# Altium PCB 65W LED Board.PcbDoc (part 1 of 3)
Units mm, origin at the board's own origin, x right, y up, seen from the top; angles counter-clockwise.
Board outline 40 x 69 mm, 4 copper layers (Top Layer, Layer 1, Layer 2, Bottom Layer), stack 1.573 mm thick; 54 components, 26 nets, 122 pads, 144 vias.
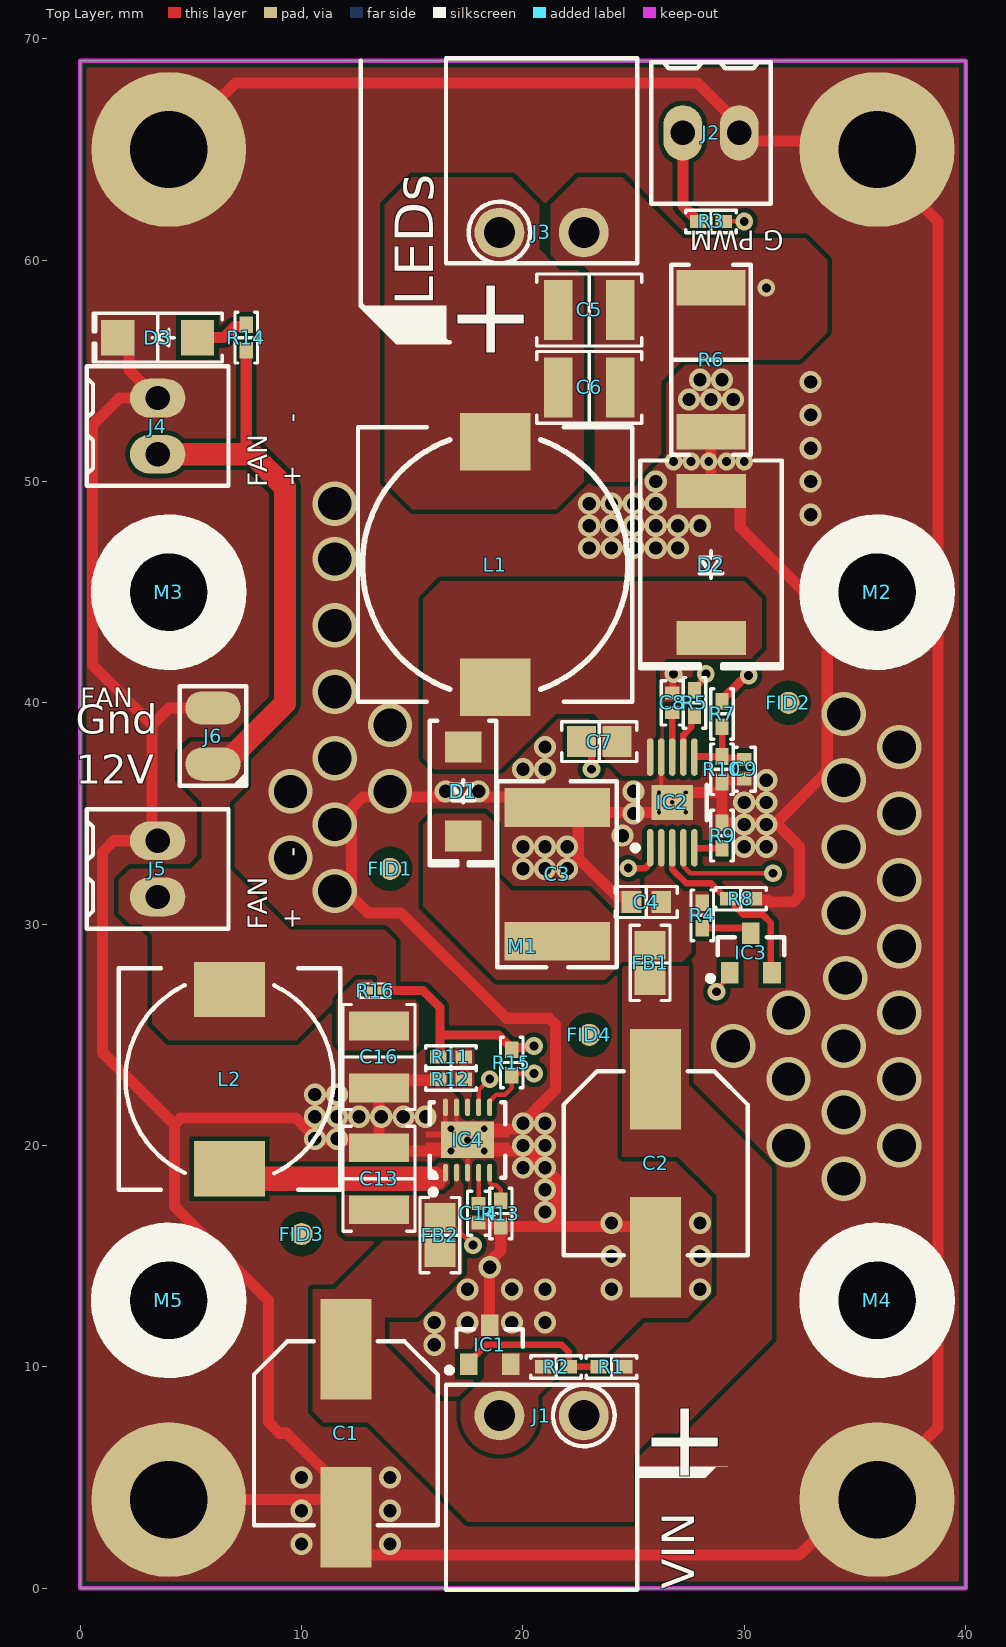
[diagram p0: Top Layer view]
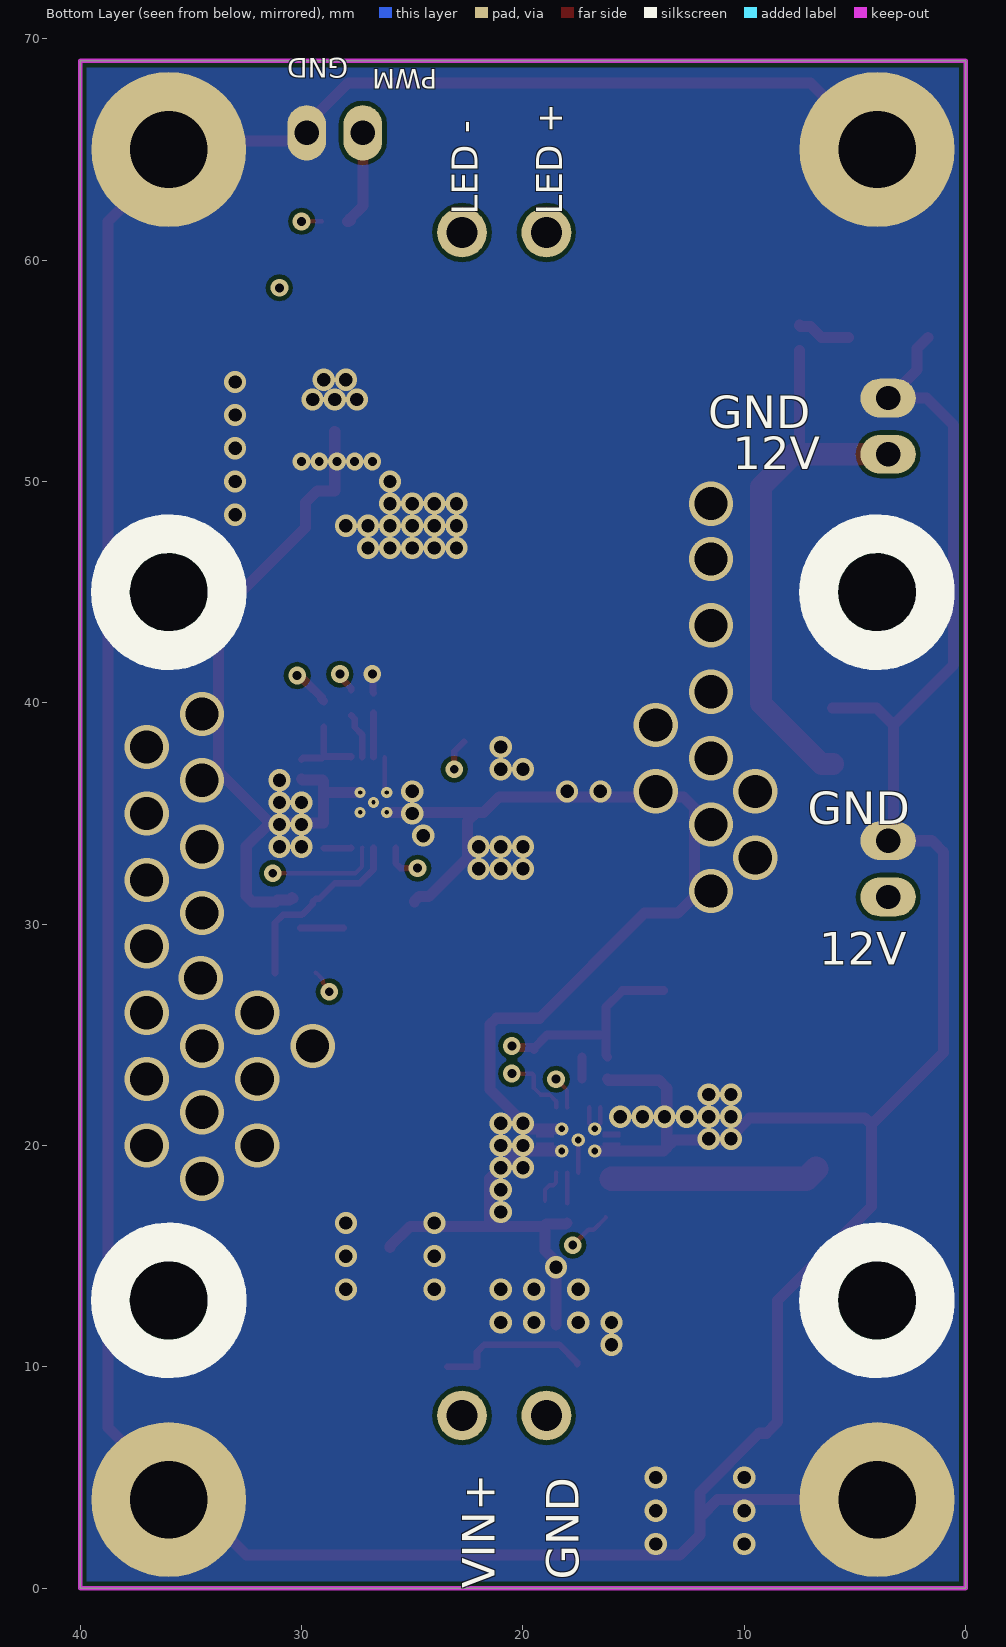
[diagram p1: Bottom Layer view, seen from below]
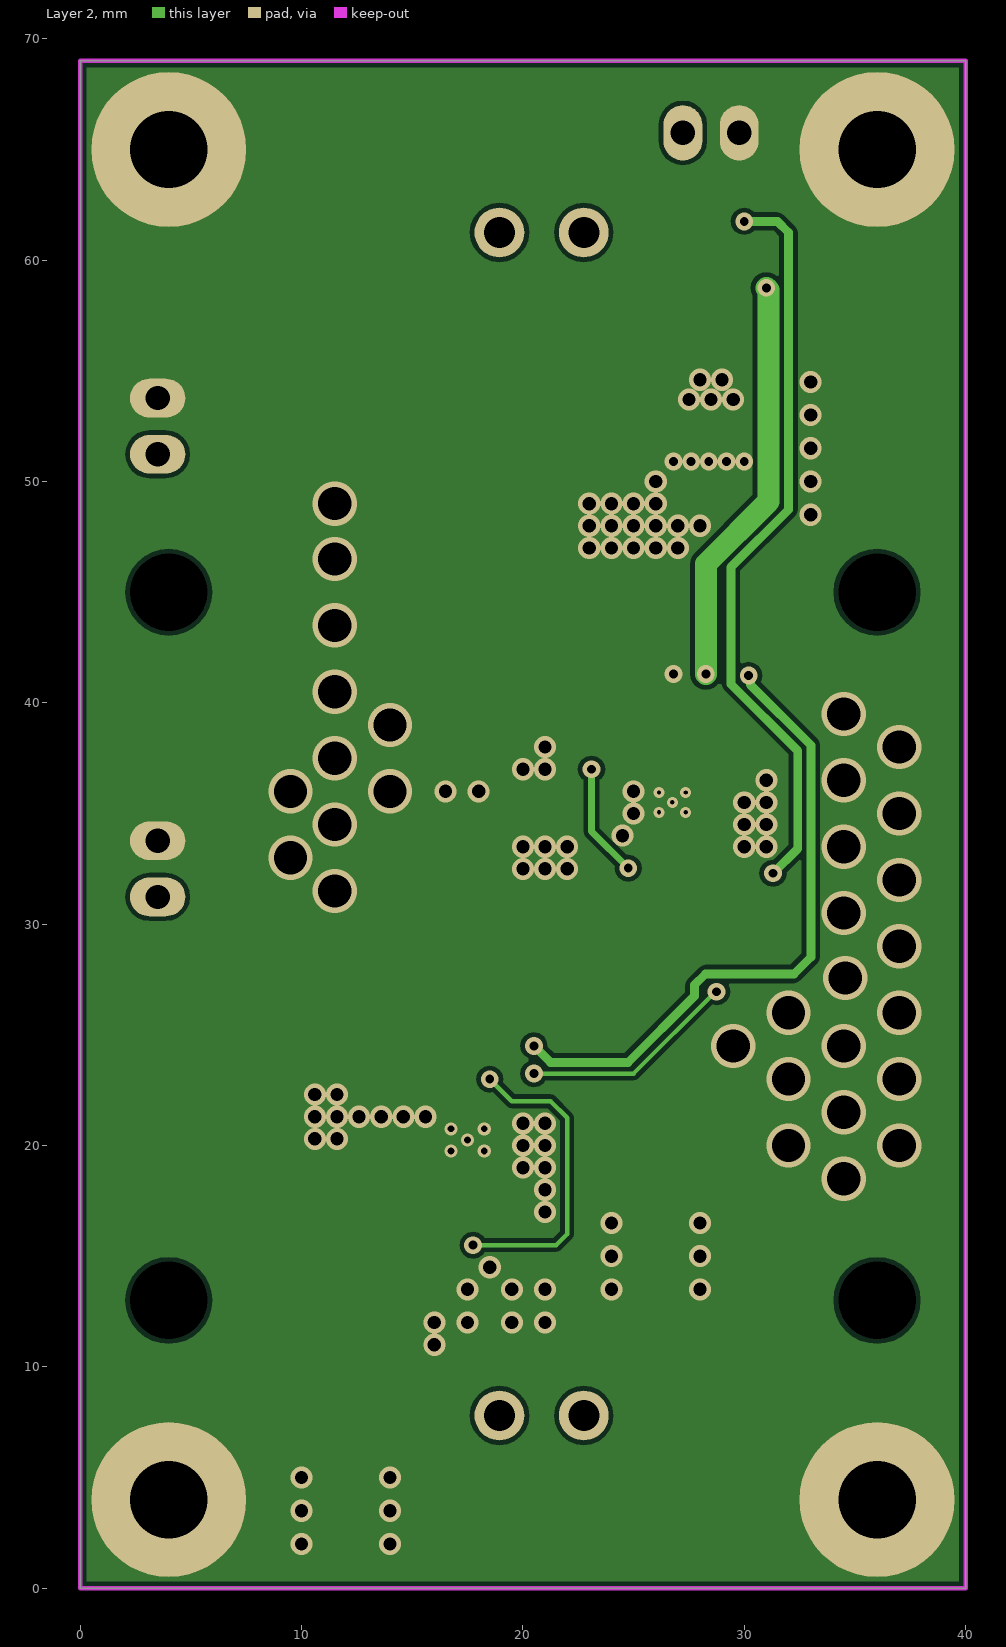
[diagram p2: Layer 2]

## Layer stack, top to bottom
Top Solder: solder mask 0.01, Solder Resist, Dk 3.8
Top Layer: signal copper 0.036
Dielectric 1: prepreg 0.2, PP-006, Dk 4.6
Layer 1: signal copper 0.018
Dielectric1: core 1.065, FR-4, Dk 4.8
Layer 2: signal copper 0.018
Dielectric 2: prepreg 0.2, PP-006, Dk 4.6
Bottom Layer: signal copper 0.036
Bottom Solder: solder mask 0.01, Solder Resist, Dk 3.8

## Board outline
0,0 40,0 40,69 0,69

## Design rules (kind name [scope] priority, off if disabled: settings)
Clearance PadClearance [IsPad vs IsPad] p1: gap=0.2 ignorepadtopadclearanceinfootprint=FALSE except(0: Arc-Hole Track-Hole SMDPad-Hole THPad-Hole Via-Hole Fill-Hole Poly-Hole Region-Hole Text-Hole)
Clearance [All] p2: gap=0.2 ignorepadtopadclearanceinfootprint=FALSE except(0: Arc-Hole Track-Hole SMDPad-Hole THPad-Hole Via-Hole Fill-Hole Poly-Hole Region-Hole Text-Hole)
ComponentClearance "ComponentClearance Mech" [HasFootprint('40MM Fan') vs HasFootprint('M3x12.7 M-F Standoff')] p1: gap=0.254 collisioncheckmode=3 verticalgap=0 showdistances=FALSE
ComponentClearance [All] p2: gap=0.254 collisioncheckmode=3 verticalgap=0.254 showdistances=FALSE
Height [All] p1: minheight=0 maxheight=50 prefheight=12.7
HoleSize [All] p1: absolutevalues=TRUE maxlimit=6 minlimit=0.4 maxpercent=80.000 minpercent=20.000
HoleToHoleClearance [All] p1: gap=0.2 allowstackedmicrovias=TRUE
MinimumSolderMaskSliver [All] p1: minsoldermaskwidth=0
PolygonConnect ViaConnect [IsVia] p1: connectstyle=Direct reliefconductorwidth=0.254 reliefentries=4 polygonreliefangle="90 Angle" airgapwidth=0.254
PolygonConnect [All] p2: connectstyle=Direct reliefconductorwidth=0.3 reliefentries=4 polygonreliefangle="90 Angle" airgapwidth=0.254
RoutingVias [All] p1: holewidth=0.6 width=1 viastyle="Through Hole" minholewidth=0.4 minwidth=0.8 maxholewidth=5 maxwidth=6
SilkToSilkClearance [All] p1: silktosilkclearance=0
SilkToSolderMaskClearance SilkscreenOverComponentPads [IsPad] p1: minsilkscreentomaskgap=0.05 clearancetoexposedcopper=TRUE
SolderMaskExpansion "Large Hole Opening" [IsVia AND (HoleDiameter > 0.6)] p1: expansion=0.18 istentingtop=FALSE
SolderMaskExpansion "Via Tenting" [IsVia AND (HoleDiameter < 0.6)] p2: expansion=-2 istentingtop=TRUE
SolderMaskExpansion [All] p3: expansion=0.1 istentingtop=FALSE
Width [All] p1: maxlimit=2 minlimit=0.2 preferedwidth=0.4
23 further rules are at their usual default settings.

## Classes and differential pairs
component class Top: C1 C2 FID1 FID2 FID3 FID4 IC1 J1 M1 M2 M3 M4 M5 R1 R2
component class "LED Driver": C3 C4 C5 C6 C7 C8 C9 D1 D2 FB1 IC2 IC3 J2 J3 L1 R3 R4 R5 R6 R7 R8 R9 R10
component class "12V Supply": C13 C14 C16 D3 FB2 IC4 J4 J5 J6 L2 R11 R12 R13 R14 R15 R16

## Components (designator, comment, footprint, x,y, rotation, side; value= is the part's Value field where it differs from the comment)
C1 "47uF" "CAP ALUM 8.3MM" 12,7 r270 top
C2 "47uF" "CAP ALUM 8.3MM" 26,19.2 r270 top
C3 "22uF" "TDK CKG57N" 21.55,32.25 r270 top
C4 "10nF" "CAP 0603/1608" 25.575,31 r0 top
C5 "10uF" "CAP 1210/3225 - 2.8MM" 23,57.75 r180 top
C6 "10uF" "CAP 1210/3225 - 2.8MM" 23,54.25 r180 top
C7 "100nF" "CAP 0805/2012" 23.45,38.25 r180 top
C8 "100nF" "CAP 0402/1005" 26.75,40 r90 top
C9 "10nF" "CAP 0402/1005" 30,37 r90 top
C13 "2.2uF" "CAP 1210/3225 - 2.5MM" 13.5,18.5 r270 top
C14 "56nF" "CAP 0402/1005" 18,16.94 r90 top
C16 "22uF" "CAP 1210/3225 - 2.8MM" 13.5,24 r90 top
D1 "SK220ATR" "ST DO214AC SMA" 17.3,36 r270 top
D2 "MBRS3100T3G" "ST DO214AB SMC" 28.5,46.25 r270 top
D3 "LTST-C230KGKT" "LED 1206/3216 GREEN" 3.5,56.5 r180 top
FB1 "MPZ2012S331ATD25" "FER 0805/2012" 25.75,28.25 r270 top
FB2 "MI0805J102R-10" "FER 0805/2012" 16.25,15.95 r270 top
FID1 "Fiducial" Fiducial 14,32.5 r90 top
FID2 "Fiducial" Fiducial 32,40 r90 top
FID3 "Fiducial" Fiducial 10,16 r90 top
FID4 "Fiducial" Fiducial 23,25 r90 top
IC1 "=ManufacturerPartNumber1" "INFINEON SOT-23-3" 18.5,11 r90 top
IC2 "TI TPS92512HVDGQR" "TI MSOP-10 DGQ" 26.75,35.5 r90 top
IC3 "='Manufacturer''Part''Number'1" "INFINEON SOT-23-3" 30.3,28.7 r90 top
IC4 "TI LM5166" "TI PVSON-10 3x3MM DRC" 17.5,20.25 r90 top
J1 "2 Pin" "FCI 06-381-2PIN" 20.845,4.5 r180 top
J2 "2 Pin" "TE 282834-2" 28.5,65.75 r0 top
J3 "2 Pin" "FCI 06-381-2PIN" 20.845,64.552 r0 top
J4 "2 Pin" "TE 282834-2" 3.5,52.5 r90 top
J5 "2 Pin" "TE 282834-2" 3.5,32.5 r90 top
J6 "2 Pin" "2 Pin Solder Pads" 6,38.5 r90 top
L1 "33uH" "TDK SLF12575" 18.75,46.25 r90 top
L2 "100uH" "TDK SLF10145" 6.75,23 r90 top
M1 "Fan" "40MM Fan" 20,29 r0 top locked
M2 "Standoff" "M3x12.7 M-F Standoff" 36,45 r0 top locked
M3 "Standoff" "M3x12.7 M-F Standoff" 4,45 r0 top locked
M4 "Standoff" "M3x12.7 M-F Standoff" 36,13 r0 top locked
M5 "Standoff" "M3x12.7 M-F Standoff" 4,13 r0 top locked
R1 "33kR" "RES 0402/1005" 24,10 r0 top
R2 "10kR" "RES 0402/1005" 21.5,10 r180 top
R3 "680R" "RES 0402/1005" 28.5,61.75 r180 top
R4 "51kR" "RES 0402/1005" 28.1,30.4 r90 top
R5 "1kR" "RES 0402/1005" 27.75,40 r90 top
R6 "150mR" "STACKPOLE CSRN2512" 28.5,55.5 r90 top
R7 "63.4kR" "RES 0402/1005" 29,39.5 r270 top
R8 "1.54kR" "RES 0402/1005" 29.85,31.15 r180 top
R9 "348kR" "RES 0402/1005" 29,34 r270 top
R10 "9.76kR" "RES 0402/1005" 29,37 r90 top
R11 "1.1MR" "RES 0402/1005" 16.75,24 r180 top
R12 "124kR" "RES 0402/1005" 16.75,23 r0 top
R13 "147kR" "RES 0402/1005" 19,16.925 r90 top
R14 "680R" "RES 0402/1005" 7.5,56.5 r90 top
R15 "10kR" "RES 0402/1005" 19.5,23.75 r90 top (schematic designator R?)
R16 "1.1R" "RES 0201/0603" 13.325,27 r0 top

## Footprints (in the part's own frame and the unit in brackets; to place one, negate y for a bottom-side part, rotate by r counter-clockwise, add the part's x,y. Pads: shape width x height; smd on the part's side, far side on the other; paste and mask are expansions set on the pad)
"2 Pin Solder Pads" [mm]
  oval 1.5x2.5 smd: 1(-1.27,0) 2(1.27,0)
  silkscreen extent -2.25,-1.5 2.25,1.5
"40MM Fan" [mm]
  silkscreen extent -17.85,-17.85 17.85,17.85, body extent -20,-20 20,20, height 27.79
"CAP 0402/1005" [mm] "Chip Capacitor, 2-Leads, Body 1.02x0.51mm, IPC Medium Density"
  rect 0.6x0.64 smd: 1(-0.44,0) 2(0.44,0)
  silkscreen extent -1,-0.5 1,0.5, body extent -0.5,-0.26 0.5,0.26, height 0.52
"CAP 0603/1608" [mm] "Chip Capacitor, 2-Leads, Body 1.60x0.80mm, IPC Medium Density"
  rect 0.9x1 smd: 1(-0.675,0) 2(0.675,0)
  silkscreen extent -1.4,-0.7 1.4,0.7, body extent -0.8,-0.41 0.8,0.41, height 0.82
"CAP 0805/2012" [mm] "Chip Capacitor, 2-Leads, Body 2.00x1.20mm, IPC Medium Density"
  rect 1.3x1.4 smd: 1(-0.8,0) 2(0.8,0)
  silkscreen extent -1.7,-0.9 1.7,0.9, body extent -1,-0.64 1,0.64, height 1.26
"CAP 1210/3225 - 2.5MM" [mm] "Chip Capacitor, 2-Leads, Body 3.20x2.50mm, IPC Medium Density"
  rect 1.3x2.7 smd: 1(-1.4,0) 2(1.4,0)
  silkscreen extent -2.37,-1.63 2.37,1.63, body extent -1.6,-1.25 1.6,1.25, height 2.5
"CAP 1210/3225 - 2.8MM" [mm] "Chip Capacitor, 2-Leads, Body 3.20x2.50mm, IPC Medium Density"
  rect 1.3x2.7 smd: 1(-1.4,0) 2(1.4,0)
  silkscreen extent -2.37,-1.63 2.37,1.63, body extent -1.6,-1.25 1.6,1.25, height 2.8
"CAP ALUM 8.3MM" [mm] "Aluminum Electrolytic Capacitor, Body 8.30x8.30x10.50mm, IPC Low Density"
  rect 4.55x2.3 smd: 1(-3.8,0) 2(3.8,0)
  silkscreen extent -4.15,-4.15 4.15,4.15, body extent -4.95,-4.15 4.95,4.15, height 10.5
"FCI 06-381-2PIN" [mm] "FCI Pluggable Terminal Block"
  round 2.25 hole 1.4: 1(-1.905,-3.302) 2(1.905,-3.302)
  silkscreen extent -4.32,-4.7 4.32,4.57, body extent -4.4,-4.7 4.4,4.5, height 7.6
"FER 0805/2012" [mm] "Chip Ferrite, 2-Leads, Body 2.00x1.20mm, IPC Medium Density"
  rect 1.3x1.4 smd: 1(-0.8,0) 2(0.8,0)
  silkscreen extent -1.7,-0.9 1.7,0.9, body extent -1,-0.64 1,0.64, height 1.26
Fiducial [mm]
  round 1 smd paste-1 mask+0.5: F(0,0)
"INFINEON SOT-23-3" [mm] "SOT23, 3-Leads, Body 2.90x2.40mm, Pitch 0.95mm, IPC Medium Density"
  rect 0.972x0.802 smd: 1(-0.885,0.95) 2(-0.885,-0.95) 3(0.885,0)
  silkscreen extent -1.27,-1.5 0.7,1.95, body extent -1.16,-1.45 1.16,1.45, height 1
"LED 1206/3216 GREEN" [mm] "Chip Diode, 2-Leads, Body 3.13x1.55mm, IPC Medium Density"
  rect 1.5x1.6 smd: 1(-1.8,0) 2(1.8,0)
  silkscreen extent -2.92,-1.1 2.92,1.1, body extent -1.6,-0.8 1.6,0.8, height 0.9
"M3x12.7 M-F Standoff" [mm]
  round 1 hole 3.5 unplated: M(0,0)
  silkscreen extent -2.64,-2.64 2.64,2.64, body extent -2.79,-3.23 2.79,3.23, height 12.71
"RES 0201/0603" [mm] "Chip Resistor, 2-Leads, Body 0.60x0.30mm, IPC Medium Density"
  rect 0.44x0.35 smd: 1(-0.325,0) 2(0.325,0)
  silkscreen extent -0.7,-0.33 0.7,0.33, body extent -0.3,-0.15 0.3,0.15, height 0.21
"RES 0402/1005" [mm] "Chip Resistor, 2-Leads, Body 1.0x0.5mm, IPC Medium Density"
  rect 0.75x0.6 smd: 1(-0.575,0) 2(0.575,0)
  silkscreen extent -1.14,-0.51 1.14,0.51, body extent -0.5,-0.25 0.5,0.25, height 0.35
"ST DO214AB SMC" [mm] "Molded Diode, 2-Leads, Body 6.85x5.90mm, IPC Medium Density"
  rect 1.54x3.14 smd: 1(-3.325,0) 2(3.325,0)
  silkscreen extent -4.7,-3.2 4.7,3.2, body extent -3.97,-2.95 3.97,2.95, height 2.6
"ST DO214AC SMA" [mm] "Molded Diode, 2-Leads, Body 4.30x2.60mm, IPC Medium Density"
  rect 1.4x1.64 smd: 1(-2.015,0) 2(2.015,0)
  silkscreen extent -3.18,-1.5 3.35,1.5, body extent -2.6,-1.37 2.6,1.37, height 2.4
"STACKPOLE CSRN2512" [mm] "Chip Resistor, 2-Leads, Body 6.40x3.20mm, IPC Medium Density"
  rect 1.6x3.1 smd: 1(-3.25,0) 2(3.25,0)
  silkscreen extent -4.3,-1.8 4.3,1.8, body extent -3.25,-1.58 3.25,1.57, height 0.6
"TDK CKG57N" [mm] "Chip Capacitor, 2-Leads, Body 6.00x5.00mm, IPC Medium Density"
  rect 1.75x4.75 smd: 1(-3.025,0) 2(3.025,0)
  silkscreen extent -4.2,-2.7 4.2,2.7, body extent -3,-2.5 3,2.5, height 3.5
"TDK SLF10145" [mm] "Precision Wire Wound Inductor, 2-Leads, Body 10.10x10.10mm, IPC Medium Density"
  rect 2.5x3.2 smd: 1(-4.05,0) 2(4.05,0)
  silkscreen extent -5,-5 5,5, body extent -5.05,-5.05 5.05,5.05, height 4.53
"TDK SLF12575" [mm] "Precision Wire Wound Inductor, 2-Leads, Body 12.50x12.50mm, IPC Medium Density"
  rect 2.6x3.2 smd: 1(-5.55,0) 2(5.55,0)
  silkscreen extent -6.2,-6.2 6.2,6.2, body extent -6.33,-6.32 6.34,6.33, height 7.85
"TE 282834-2" [mm]
  oval 1.75x2.5 hole 1.1: 1(-1.27,0) 2(1.27,0)
  silkscreen extent -2.7,-3.2 2.7,3.2, body extent -2.77,-3.25 2.77,3.25, height 10
"TI MSOP-10 DGQ" [mm] "TSSOP, 10-Leads, Body 3x3mm, Pitch 0.5mm, Thermal Pad 1.88x1.57mm, IPC Medium Density"
  oval 1.7x0.3 smd: 1(-2.05,1) 2(-2.05,0.5) 3(-2.05,0) 4(-2.05,-0.5) 5(-2.05,-1) 6(2.05,-1) 7(2.05,-0.5) 8(2.05,0) 9(2.05,0.5) 10(2.05,1)
  rect 1.57x1.88 smd: 11(0,0)
  silkscreen extent -2.17,-1.55 0.8,1.8, body extent -2.46,-1.5 2.46,1.5, height 1.2
"TI PVSON-10 3x3MM DRC" [mm] "PVSON, 10-Leads, Body 3.00x3.00mm, Pitch 0.50mm, Thermal Pad 1.65x2.40mm, IPC Medium Density"
  oval 0.8x0.23 smd: 1(-1.475,1) 2(-1.475,0.5) 3(-1.475,0) 4(-1.475,-0.5) 5(-1.475,-1) 6(1.475,-1) 7(1.475,-0.5) 8(1.475,0) 9(1.475,0.5) 10(1.475,1)
  rect 1.65x2.4 smd paste-5: 11(0,0)
  Top Layer region: 0.11,-1.9 0.39,-1.9 0.39,-1.1 0.11,-1.1
  Top Layer region: -0.11,-1.1 -0.39,-1.1 -0.39,-1.9 -0.11,-1.9
  Top Layer region: -0.11,1.9 -0.39,1.9 -0.39,1.1 -0.11,1.1
  Top Layer region: 0.11,1.1 0.39,1.1 0.39,1.9 0.11,1.9
  silkscreen extent -2.47,-1.7 1.7,1.7, body extent -1.55,-1.55 1.55,1.55, height 1

## Part data
C1 C2: library part "Polarised Capacitor", "Aluminum Electrolytic Capacitors - SMD 63volts 47uF 20% 85C 8X10", Case/Package=Radial, Dielectric Material=Aluminium, Manufacturer 1=Nichicon, Manufacturer Part Number 1=UUR1J470MNL1GS, Max Operating Temperature=85°C, Min Operating Temperature=-40°C, Package Quantity=500, Ripple Current=140mA, Supplier Part Number 1=493-6235-1-ND, Tolerance=20%, Voltage Rating=63V, Capacitance=47uF, Category="Aluminum Electrolytic Capacitors", ComponentLink1Description=https://datasheet.ciiva.com/6326/e-ur-6326870.pdf?src-supplier=Digi-Key, ComponentLink1URL=https://datasheet.ciiva.com/6326/e-ur-6326870.pdf?src-supplier=Digi-Key, ComponentLink2Description=https://datasheet.ciiva.com/6326/e-ur-6326872.pdf?src-supplier=Digi-Key, ComponentLink2URL=https://datasheet.ciiva.com/6326/e-ur-6326872.pdf?src-supplier=Digi-Key, ComponentLink3Description=https://datasheet.ciiva.com/11686/e-ur-11686922.pdf?src-supplier=Avnet, ComponentLink3URL=https://datasheet.ciiva.com/11686/e-ur-11686922.pdf?src-supplier=Avnet, ComponentLink4Description=https://datasheet.ciiva.com/16380/e-ur-16380363.pdf?src-supplier=Future+Electronics, ComponentLink4URL=https://datasheet.ciiva.com/16380/e-ur-16380363.pdf?src-supplier=Future+Electronics, Contact Plating=Tin, Diameter=8mm, Dissipation Factor=0.12%, Features="General Purpose", Height=10mm, Height - Seated (Max)=0.413inch, Lead Free="Lead Free", Length=10mm, Life (Hours)=2000Hour, Mount="Surface Mount", Packaging="Tape and Reel", Pricing 1="1=0.55000, 10=0.38800, 100=0.25520 (USD)", Radiation Hardening=No, RoHS=Yes, Stock 1=3231, Supplier 1=Digi-Key, Termination=SMD/SMT, Voltage Rating (DC)=63V
C3: library part Capacitor, "TDK - CKG57NX7S2A226M500JH - CAP, 22µF, 100V, 20%, X7S, 2220", Case Code (Imperial)=2220, Case Code (Metric)=5750, Dielectric=X7S, Manufacturer 1=TDK, Manufacturer Part Number 1=CKG57NX7S2A226M500JH, Max Operating Temperature=125°C, Min Operating Temperature=-55°C, Package Quantity=1, Supplier Part Number 1=445-5217-1-ND, Tolerance=20%, Voltage=100V, Capacitance=22uF, Case/Package=2220, Category="Ceramic Capacitors", ComponentLink1Description=https://datasheet.ciiva.com/30054/506print-detail-pdf-phplangenpart-nockg57nx7s2a226m500jhimp-unit-xmh-30054990.pdf?src-supplier=Onlinecomponents.com, ComponentLink1URL=https://datasheet.ciiva.com/30054/506print-detail-pdf-phplangenpart-nockg57nx7s2a226m500jhimp-unit-xmh-30054990.pdf?src-supplier=Onlinecomponents.com, ComponentLink2Description=https://datasheet.ciiva.com/24216/ckg57nx7s2a226m500jh-266237-24216591.pdf?src-supplier=Mouser, ComponentLink2URL=https://datasheet.ciiva.com/24216/ckg57nx7s2a226m500jh-266237-24216591.pdf?src-supplier=Mouser, ComponentLink3Description=https://datasheet.ciiva.com/8079/1796627-8079399.pdf?src-supplier=Element14, ComponentLink3URL=https://datasheet.ciiva.com/8079/1796627-8079399.pdf?src-supplier=Element14, ComponentLink4Description=https://datasheet.ciiva.com/6283/mlcc-commercial-megacap-en-6283517.pdf?src-supplier=Digi-Key, ComponentLink4URL=https://datasheet.ciiva.com/6283/mlcc-commercial-megacap-en-6283517.pdf?src-supplier=Digi-Key, ComponentLink5Description=https://datasheet.ciiva.com/6283/mlcc-commercial-megacap-en-6283519.pdf?src-supplier=Digi-Key, ComponentLink5URL=https://datasheet.ciiva.com/6283/mlcc-commercial-megacap-en-6283519.pdf?src-supplier=Digi-Key, Composition=Ceramic, Depth=5mm, Height=5mm, Lead Free="Lead Free", Lead/Base Style=L-Lead, Length=6mm, Mount="Surface Mount", Number of Pins=2, Packaging="Tape and Reel", Pricing 1="1=5.22000, 10=4.69600, 100=3.54830, 500=2.92216 (USD)", REACH SVHC="No SVHC", RoHS=Yes, Stock 1=59963, Supplier 1=Digi-Key, Termination=Metal, Thickness=0.217inch, Voltage Rating=100V, Voltage Rating (DC)=100V, Width=0.197inch
C4: library part Capacitor, "Multilayer Ceramic Capacitors MLCC - SMD/SMT .01uF 100Volts 10%", Case Code (Imperial)=0603, Case Code (Metric)=1608, Dielectric=X7R, Manufacturer 1=Murata, Manufacturer Part Number 1=GRM188R72A103KA01D, Max Operating Temperature=125°C, Min Operating Temperature=-55°C, Package Quantity=4000, Supplier Part Number 1=2666521, Tolerance=10%, Voltage=100V, Capacitance=10nF, Case/Package=0603, Category="Ceramic Capacitors", ComponentLink1Description=https://datasheet.ciiva.com/6270/product-6270672.pdf?src-supplier=Digi-Key, ComponentLink1URL=https://datasheet.ciiva.com/6270/product-6270672.pdf?src-supplier=Digi-Key, ComponentLink2Description=https://datasheet.ciiva.com/18100/getdatasheetpartid-27582-18100672.pdf?src-supplier=Verical, ComponentLink2URL=https://datasheet.ciiva.com/18100/getdatasheetpartid-27582-18100672.pdf?src-supplier=Verical, ComponentLink3Description=https://datasheet.ciiva.com/11789/0900766b80ef921d-11789050.pdf?src-supplier=RSComponents, ComponentLink3URL=https://datasheet.ciiva.com/11789/0900766b80ef921d-11789050.pdf?src-supplier=RSComponents, ComponentLink4Description=https://datasheet.ciiva.com/29201/451970-da-01-en-vs-kondensator-0603-29201715.pdf?src-supplier=Conrad, ComponentLink4URL=https://datasheet.ciiva.com/29201/451970-da-01-en-vs-kondensator-0603-29201715.pdf?src-supplier=Conrad, ComponentLink5Description=https://datasheet.ciiva.com/6270/partnumbering-e-01-6270678.pdf?src-supplier=Digi-Key, ComponentLink5URL=https://datasheet.ciiva.com/6270/partnumbering-e-01-6270678.pdf?src-supplier=Digi-Key, Depth=0.8mm, Height=0.8mm, Lead Free="Lead Free", Length=1.6mm, Material=Ceramic, Mount="Surface Mount", Packaging="Tape and Reel", Pricing 1="4000=0.01000, 20000=0.00740, 40000=0.00630 (GBP)", Radiation Hardening=No, REACH SVHC="No SVHC", RoHS=Yes, Stock 1=4000, Supplier 1=Farnell, Termination=SMD/SMT, Thickness=0.035inch, Voltage Rating=100V, Voltage Rating (DC)=100V, Width=0.031inch
C5 C6: library part Capacitor, "CAP CER 10UF 50V X7R 1210", Case Code (Imperial)=1210, Case Code (Metric)=3225, Dielectric=X7R, Manufacturer 1=Samsung, Manufacturer Part Number 1=CL32B106KBJNNWE, Max Operating Temperature=125°C, Min Operating Temperature=-55°C, Package Quantity=1, Supplier Part Number 1=1276-3388-1-ND, Tolerance=10%, Voltage Rating=50V, Capacitance=10uF, Case/Package=1210, Category="Ceramic Capacitors", ComponentLink1Description=https://datasheet.ciiva.com/25721/cl32b106kbjnnwe-25721651.pdf?src-supplier=Digi-Key, ComponentLink1URL=https://datasheet.ciiva.com/25721/cl32b106kbjnnwe-25721651.pdf?src-supplier=Digi-Key, Lead Free="Lead Free", Length=0.126inch, Mount="Surface Mount", Packaging="Tape and Reel", Pricing 1="1=0.66000, 10=0.46700, 100=0.30740, 500=0.22770 (USD)", RoHS=Yes, Stock 1=561396, Supplier 1=Digi-Key, Thickness=0.106inch, Width=0.098inch
C7: library part Capacitor, "Multilayer Ceramic Capacitors MLCC - SMD/SMT 50volts 0.1uF X7R 20%", Case/Package=0805, Dielectric=X7R, Dielectric Material=Ceramic, Manufacturer 1=KEMET, Manufacturer Part Number 1=C0805C104M5RACTU, Max Operating Temperature=125°C, Min Operating Temperature=-55°C, Supplier Part Number 1=399-1169-1-ND, Tolerance=20%, Voltage Rating (DC)=50V, Capacitance=100nF, Category="Ceramic Capacitors", ComponentLink10Description=http://www.alliedelec.com/m/d/9bfe7773041ffe9d406e68bc7b377fdd.pdf?src-supplier=Allied+Electronics, ComponentLink10URL=http://www.alliedelec.com/m/d/9bfe7773041ffe9d406e68bc7b377fdd.pdf?src-supplier=Allied+Electronics, ComponentLink11Description=http://components.arrow.com/part/dataview/2091108S8109171N7429?src-supplier=Arrow, ComponentLink11URL=http://components.arrow.com/part/dataview/2091108S8109171N7429?src-supplier=Arrow, ComponentLink12Description=http://capacitoredge.kemet.com/capedge2/DataSheet?pn=C0805C104M5RACTU&src-supplier=Avnet+Europe, ComponentLink12URL=http://capacitoredge.kemet.com/capedge2/DataSheet?pn=C0805C104M5RACTU&src-supplier=Avnet+Europe, ComponentLink13Description=http://www.mouser.com/ds/2/212/KEM_C1002_X7R_SMD-1102033.pdf?src-supplier=Mouser, ComponentLink13URL=http://www.mouser.com/ds/2/212/KEM_C1002_X7R_SMD-1102033.pdf?src-supplier=Mouser, ComponentLink14Description=http://www.farnell.com/datasheets/2120141.pdf?src-supplier=Element14, ComponentLink14URL=http://www.farnell.com/datasheets/2120141.pdf?src-supplier=Element14, ComponentLink15Description=http://www.farnell.com/datasheets/1851736.pdf?src-supplier=Element14, ComponentLink15URL=http://www.farnell.com/datasheets/1851736.pdf?src-supplier=Element14, ComponentLink16Description=https://www.verical.com/server-webapp/html/getDatasheet?partID=91523&src-supplier=Verical, ComponentLink16URL=https://www.verical.com/server-webapp/html/getDatasheet?partID=91523&src-supplier=Verical, ComponentLink17Description=https://api.kemet.com/component-edge/download/datasheet/C0805C104M5RACTU.pdf?src-supplier=Digi-Key, ComponentLink17URL=https://api.kemet.com/component-edge/download/datasheet/C0805C104M5RACTU.pdf?src-supplier=Digi-Key, ComponentLink1Description=http://uk.rs-online.com/webdocs/13da/0900766b813daa06.pdf?src-supplier=RSComponents, ComponentLink1URL=http://uk.rs-online.com/webdocs/13da/0900766b813daa06.pdf?src-supplier=RSComponents, ComponentLink2Description=http://www.farnell.com/datasheets/2315435.pdf?src-supplier=Farnell, ComponentLink2URL=http://www.farnell.com/datasheets/2315435.pdf?src-supplier=Farnell, ComponentLink3Description=http://uk.rs-online.com/webdocs/1515/0900766b81515223.pdf?src-supplier=RSComponents, ComponentLink3URL=http://uk.rs-online.com/webdocs/1515/0900766b81515223.pdf?src-supplier=RSComponents, ComponentLink4Description=http://www.farnell.com/datasheets/2739857.pdf?src-supplier=Farnell, ComponentLink4URL=http://www.farnell.com/datasheets/2739857.pdf?src-supplier=Farnell, ComponentLink5Description=https://www.verical.com/server-webapp/html/getDatasheet?partID=774625&src-supplier=Verical, ComponentLink5URL=https://www.verical.com/server-webapp/html/getDatasheet?partID=774625&src-supplier=Verical, ComponentLink6Description=http://www.farnell.com/datasheets/2120141.pdf?src-supplier=Farnell, ComponentLink6URL=http://www.farnell.com/datasheets/2120141.pdf?src-supplier=Farnell, ComponentLink7Description=http://components.arrow.com/part/dataview/0323_00324812?src-supplier=Arrow+Europe, ComponentLink7URL=http://components.arrow.com/part/dataview/0323_00324812?src-supplier=Arrow+Europe, ComponentLink8Description=http://uk.rs-online.com/webdocs/1528/0900766b81528e2f.pdf?src-supplier=RSComponents, ComponentLink8URL=http://uk.rs-online.com/webdocs/1528/0900766b81528e2f.pdf?src-supplier=RSComponents, ComponentLink9Description=http://www.farnell.com/datasheets/2739857.pdf?src-supplier=Newark, ComponentLink9URL=http://www.farnell.com/datasheets/2739857.pdf?src-supplier=Newark, Depth=1.25mm, Height=0.9mm, Length=2mm, Mount="Surface Mount", Packaging="Tape and Reel", Pricing 1="1=0.10000, 10=0.07400, 100=0.03290, 500=0.02348, 1000=0.01845 (USD)", Radiation Hardening=No, RoHS=Yes, Stock 1=1391611, Supplier 1=Digi-Key
C8: library part Capacitor, "MURATA - GRM155R62A104KE14D - CAP, 0.1µF, 100V, 10%, X5R, 0402", Case Code (Imperial)=0402, Case Code (Metric)=1005, Dielectric=X5R, Manufacturer 1=Murata, Manufacturer Part Number 1=GRM155R62A104KE14D, Max Operating Temperature=85°C, Min Operating Temperature=-55°C, Package Quantity=10000, Supplier Part Number 1=490-10458-1-ND, Tolerance=10%, Voltage Rating=100V, Capacitance=100nF, Case/Package=0402, Category="Ceramic Capacitors", ComponentLink1Description=http://www.mouser.com/ds/2/281/c02e-2905.pdf?src-supplier=Mouser, ComponentLink1URL=http://www.mouser.com/ds/2/281/c02e-2905.pdf?src-supplier=Mouser, ComponentLink2Description=http://www.farnell.com/datasheets/2079151.pdf?src-supplier=Farnell, ComponentLink2URL=http://www.farnell.com/datasheets/2079151.pdf?src-supplier=Farnell, ComponentLink3Description=http://www.farnell.com/datasheets/2079151.pdf?src-supplier=Element14, ComponentLink3URL=http://www.farnell.com/datasheets/2079151.pdf?src-supplier=Element14, ComponentLink4Description=http://search.murata.co.jp/Ceramy/image/img/A01X/G101/ENG/GRM155R62A104KE14-01.pdf?src-supplier=Digi-Key, ComponentLink4URL=http://search.murata.co.jp/Ceramy/image/img/A01X/G101/ENG/GRM155R62A104KE14-01.pdf?src-supplier=Digi-Key, ComponentLink5Description=http://www.farnell.com/datasheets/2079151.pdf?src-supplier=Newark, ComponentLink5URL=http://www.farnell.com/datasheets/2079151.pdf?src-supplier=Newark, Height=0.5mm, Lead Free="Lead Free", Length=0.039inch, Mount="Surface Mount", Packaging="Tape and Reel", Pricing 1="1=0.10000, 10=0.03500, 100=0.01580, 500=0.01128, 1000=0.00886, 2500=0.00805, 5000=0.00741 (USD)", REACH SVHC="No SVHC", RoHS=Yes, Stock 1=539925, Supplier 1=Digi-Key, Termination=SMD/SMT, Thickness=0.022inch, Voltage Rating (DC)=100V, Weight=0.000212oz, Width=0.5mm
C9: library part Capacitor, "TAIYO YUDEN - TMK105B7103KV-F - CERAMIC CAPACITOR 0.01UF, 25V, X7R, 10%, 0402, FULL REEL", Case Code (Imperial)=0402, Case Code (Metric)=1005, Dielectric=X7R, Manufacturer 1="Taiyo Yuden", Manufacturer Part Number 1=TMK105B7103KV-F, Max Operating Temperature=125°C, Min Operating Temperature=-55°C, Package Quantity=1, Supplier Part Number 1=587-1223-1-ND, Tolerance=10%, Voltage=25V, Capacitance=10nF, Case/Package=0402, Category="Ceramic Capacitors", ComponentLink1Description=https://datasheet.ciiva.com/129/tmk105b7103kv-f-ss-129699.pdf?src-supplier=Digi-Key, ComponentLink1URL=https://datasheet.ciiva.com/129/tmk105b7103kv-f-ss-129699.pdf?src-supplier=Digi-Key, ComponentLink2Description=https://datasheet.ciiva.com/30192/438tmk105b7103kv-f-30192315.pdf?src-supplier=Onlinecomponents.com, ComponentLink2URL=https://datasheet.ciiva.com/30192/438tmk105b7103kv-f-30192315.pdf?src-supplier=Onlinecomponents.com, ComponentLink3Description=https://datasheet.ciiva.com/15922/204tmk105b7103kv-f-15922348.pdf?src-supplier=Onlinecomponents.com, ComponentLink3URL=https://datasheet.ciiva.com/15922/204tmk105b7103kv-f-15922348.pdf?src-supplier=Onlinecomponents.com, ComponentLink4Description=https://datasheet.ciiva.com/30156/190tmk105b7103kv-f-30156174.pdf?src-supplier=Onlinecomponents.com, ComponentLink4URL=https://datasheet.ciiva.com/30156/190tmk105b7103kv-f-30156174.pdf?src-supplier=Onlinecomponents.com, ComponentLink5Description=https://datasheet.ciiva.com/7975/746258-7975835.pdf?src-supplier=Element14, ComponentLink5URL=https://datasheet.ciiva.com/7975/746258-7975835.pdf?src-supplier=Element14, ComponentLink6Description=https://datasheet.ciiva.com/28645/746258-28645254.pdf?src-supplier=Element14, ComponentLink6URL=https://datasheet.ciiva.com/28645/746258-28645254.pdf?src-supplier=Element14, Composition=Ceramic, Contact Plating=Tin, Depth=0.5mm, Halogen Free="Halogen Free", Height=0.5mm, Length=1mm, Mount="Surface Mount", Packaging="Tape and Reel", Pricing 1="1=0.10000, 10=0.01700, 100=0.00780, 500=0.00554, 1000=0.00436, 2500=0.00396, 5000=0.00364 (USD)", REACH SVHC=Unknown, RoHS=Yes, Stock 1=1391775, Supplier 1=Digi-Key, Termination=SMD/SMT, Thickness=0.022inch, Voltage Rating=25V, Voltage Rating (DC)=25V, Width=0.02inch
C13: library part Capacitor, "CAP CER 2.2UF 100V X7R 1210", Case Code (Imperial)=1210, Case Code (Metric)=3225, Dielectric=X7R, Manufacturer 1=TDK, Manufacturer Part Number 1=C3225X7R2A225K230AB, Max Operating Temperature=125°C, Min Operating Temperature=-55°C, Package Quantity=1, Supplier Part Number 1=445-4497-1-ND, Tolerance=10%, Voltage=100V, Capacitance=2.2uF, Case/Package=1210, Category="Ceramic Capacitors", ComponentLink1Description=https://datasheet.ciiva.com/24216/c3225x7r2a225k230ab-265480-24216578.pdf?src-supplier=Mouser, ComponentLink1URL=https://datasheet.ciiva.com/24216/c3225x7r2a225k230ab-265480-24216578.pdf?src-supplier=Mouser, ComponentLink2Description=https://datasheet.ciiva.com/15192/getdatasheetpartid-725361-15192330.pdf?src-supplier=Verical, ComponentLink2URL=https://datasheet.ciiva.com/15192/getdatasheetpartid-725361-15192330.pdf?src-supplier=Verical, ComponentLink3Description=https://datasheet.ciiva.com/22694/1698875-22694183.pdf?src-supplier=Element14, ComponentLink3URL=https://datasheet.ciiva.com/22694/1698875-22694183.pdf?src-supplier=Element14, ComponentLink4Description=https://datasheet.ciiva.com/28620/1484596-28620679.pdf?src-supplier=Element14, ComponentLink4URL=https://datasheet.ciiva.com/28620/1484596-28620679.pdf?src-supplier=Element14, ComponentLink5Description=https://datasheet.ciiva.com/48671/mlcc-commercial-midvoltage-en-48671370.pdf?src-supplier=Avnet, ComponentLink5URL=https://datasheet.ciiva.com/48671/mlcc-commercial-midvoltage-en-48671370.pdf?src-supplier=Avnet, Composition=Ceramic, Depth=2.5mm, Height=2.3mm, Lead Free="Lead Free", Length=3.2mm, Mount="Surface Mount", Number of Pins=2, Packaging="Tape and Reel", Pricing 1="1=0.81000, 10=0.57100, 100=0.37570, 500=0.27830 (USD)", Radiation Hardening=No, REACH SVHC="No SVHC", RoHS=Yes, Stock 1=239935, Supplier 1=Digi-Key, Termination=SMD/SMT, Thickness=0.098inch, Voltage Rating=100V, Voltage Rating (DC)=100V, Weight=0.000564oz, Width=2.5mm
C14: library part Capacitor, "Cap Ceramic 0.056uF 16V X7R 10% SMD 0402 125C Paper T/R", Case Code (Imperial)=0402, Case Code (Metric)=1005, Dielectric=X7R, Manufacturer 1=Murata, Manufacturer Part Number 1=GRM155R71C563KA88D, Max Operating Temperature=125°C, Min Operating Temperature=-55°C, Package Quantity=1, Supplier Part Number 1=490-6336-1-ND, Tolerance=10%, Voltage=16V, Capacitance=56nF, Case/Package=0402, Category="Ceramic Capacitors", ComponentLink1Description=https://datasheet.ciiva.com/3780/9037grm155r71c563ka8823-3780020.pdf?src-supplier=Arrow, ComponentLink1URL=https://datasheet.ciiva.com/3780/9037grm155r71c563ka8823-3780020.pdf?src-supplier=Arrow, ComponentLink2Description=https://datasheet.ciiva.com/18184/getdatasheetpartid-300518-18184677.pdf?src-supplier=Verical, ComponentLink2URL=https://datasheet.ciiva.com/18184/getdatasheetpartid-300518-18184677.pdf?src-supplier=Verical, ComponentLink3Description=https://datasheet.ciiva.com/5413/product-5413719.pdf?src-supplier=Mouser, ComponentLink3URL=https://datasheet.ciiva.com/5413/product-5413719.pdf?src-supplier=Mouser, ComponentLink4Description=https://datasheet.ciiva.com/6270/partnumbering-e-01-6270812.pdf?src-supplier=Digi-Key, ComponentLink4URL=https://datasheet.ciiva.com/6270/partnumbering-e-01-6270812.pdf?src-supplier=Digi-Key, ComponentLink5Description=https://datasheet.ciiva.com/6270/partnumbering-e-01-6270814.pdf?src-supplier=Digi-Key, ComponentLink5URL=https://datasheet.ciiva.com/6270/partnumbering-e-01-6270814.pdf?src-supplier=Digi-Key, Depth=0.5mm, Height=0.5mm, Lead Free="Lead Free", Length=1mm, Material=Ceramic, Mount="Surface Mount", Packaging="Tape and Reel", Pricing 1="1=0.10000, 10=0.07100, 100=0.03160, 500=0.02254, 1000=0.01771, 2500=0.01610, 5000=0.01481 (USD)", Radiation Hardening=No, RoHS=Yes, Stock 1=113059, Supplier 1=Digi-Key, Termination=SMD/SMT, Thickness=0.022inch, Voltage Rating=16V, Voltage Rating (DC)=16V, Width=0.5mm
C16: library part Capacitor, "Cap Ceramic 22uF 25V X5R 10% SMD 1210 85C Embossed T/R", Case Code (Imperial)=1210, Case Code (Metric)=3225, Dielectric=X5R, Manufacturer 1=Samsung, Manufacturer Part Number 1=CL32A226KAJNNNE, Max Operating Temperature=85°C, Min Operating Temperature=-55°C, Package Quantity=1, Supplier Part Number 1=1276-1101-1-ND, Tolerance=10%, Voltage=25V, Capacitance=22uF, Case/Package=1210, Category="Ceramic Capacitors", ComponentLink1Description=https://datasheet.ciiva.com/16202/cl32a226kajnnne-16202745.pdf?src-supplier=Future+Electronics, ComponentLink1URL=https://datasheet.ciiva.com/16202/cl32a226kajnnne-16202745.pdf?src-supplier=Future+Electronics, ComponentLink2Description=https://datasheet.ciiva.com/26947/getdatasheetpartid-358377-26947025.pdf?src-supplier=Verical, ComponentLink2URL=https://datasheet.ciiva.com/26947/getdatasheetpartid-358377-26947025.pdf?src-supplier=Verical, ComponentLink3Description=https://datasheet.ciiva.com/29241/450711-da-01-en-vs-kondensator-1210-29241799.pdf?src-supplier=Conrad, ComponentLink3URL=https://datasheet.ciiva.com/29241/450711-da-01-en-vs-kondensator-1210-29241799.pdf?src-supplier=Conrad, Contact Plating=Tin, Depth=2.5mm, Height=2.5mm, Length=3.2mm, Material=Ceramic, Mount="Surface Mount", Packaging="Tape and Reel", Pricing 1="1=0.51000, 10=0.36300, 100=0.23920, 500=0.17722 (USD)", Radiation Hardening=No, RoHS=Yes, Stock 1=54466, Supplier 1=Digi-Key, Thickness=0.106inch, Voltage Rating=25V, Width=0.098inch
D1: library part Diode, "DIODE SCHOTTKY 200V 2A SMA", Average Rectified Current=2A, Case/Package=SMA, Manufacturer 1=SMC, Max Reverse Voltage (DC)=200V, Supplier Part Number 1=1655-2135-1-ND, Category="Rectifier Diodes", ComponentLink1Description=http://www.smc-diodes.com/propdf/SK220A%20N0942%20REV.B.pdf?src-supplier=Digi-Key, ComponentLink1URL=http://www.smc-diodes.com/propdf/SK220A%20N0942%20REV.B.pdf?src-supplier=Digi-Key, Manufacturer Part Number 1=SK220ATR, Mount="Surface Mount", Packaging="Cut Tape", Pricing 1="1=0.34000, 10=0.25500, 100=0.12090, 500=0.09864, 1000=0.07319, 2500=0.06428 (USD)", RoHS=No, Stock 1=7950, Supplier 1=Digi-Key
D2: library part Diode, "DIODE SCHOTTKY 100V 3A SMC", Average Rectified Current=3A, Case/Package=SMC, Forward Voltage=790mV, Manufacturer 1="ON Semiconductor", Max Forward Surge Current (Ifsm)=130A, Max Operating Temperature=175°C, Max Repetitive Reverse Voltage (Vrrm)=100V, Max Reverse Leakage Current=50uA, Min Operating Temperature=-65°C, Package Quantity=2500, Supplier Part Number 1=MBRS3100T3GOSCT-ND, Category="Rectifier Diodes", ComponentLink1Description=https://datasheet.ciiva.com/5763/mbrs3100t3-d-5763024.pdf?src-supplier=Farnell, ComponentLink1URL=https://datasheet.ciiva.com/5763/mbrs3100t3-d-5763024.pdf?src-supplier=Farnell, ComponentLink2Description=https://datasheet.ciiva.com/23818/1708279-23818758.pdf?src-supplier=Newark, ComponentLink2URL=https://datasheet.ciiva.com/23818/1708279-23818758.pdf?src-supplier=Newark, ComponentLink3Description=https://datasheet.ciiva.com/4715/mbrs3100t3-d-109621-4715394.pdf?src-supplier=Mouser, ComponentLink3URL=https://datasheet.ciiva.com/4715/mbrs3100t3-d-109621-4715394.pdf?src-supplier=Mouser, ComponentLink4Description=https://datasheet.ciiva.com/916/mbrs3100t3-d-916203.pdf?src-supplier=Digi-Key, ComponentLink4URL=https://datasheet.ciiva.com/916/mbrs3100t3-d-916203.pdf?src-supplier=Digi-Key, ComponentLink5Description=https://datasheet.ciiva.com/25954/mbrs3100t3-d-25954253.pdf?src-supplier=Avnet+Europe, ComponentLink5URL=https://datasheet.ciiva.com/25954/mbrs3100t3-d-25954253.pdf?src-supplier=Avnet+Europe, ComponentLink6Description=https://datasheet.ciiva.com/7962/mbrs3100t3-d-7962821.pdf?src-supplier=Element14, ComponentLink6URL=https://datasheet.ciiva.com/7962/mbrs3100t3-d-7962821.pdf?src-supplier=Element14, ComponentLink7Description=https://datasheet.ciiva.com/16389/mbrs3100t3-d-16389739.pdf?src-supplier=Future+Electronics, ComponentLink7URL=https://datasheet.ciiva.com/16389/mbrs3100t3-d-16389739.pdf?src-supplier=Future+Electronics, ComponentLink8Description=https://datasheet.ciiva.com/8299/mbrs3100t3-d-8299854.pdf?src-supplier=Avnet, ComponentLink8URL=https://datasheet.ciiva.com/8299/mbrs3100t3-d-8299854.pdf?src-supplier=Avnet, Contact Plating=Tin,Matte, Current Rating=3A, Element Configuration=Single, Forward Current=3A, Halogen Free="Halogen Free", Height=2.13mm, Lead Free="Lead Free", Length=6.86mm, Manufacturer Part Number 1=MBRS3100T3G, Max Reverse Voltage (DC)=100V, Max Surge Current=130A, Number of Pins=2, Output Current=3A, Packaging="Tape and Reel", Peak Non-Repetitive Surge Current=130A, Peak Reverse Current=50uA, Polarity=Standard, Pricing 1="1=0.51000, 10=0.43800, 100=0.30340, 500=0.23690, 1000=0.19256 (USD)", Radiation Hardening=No, REACH SVHC="No SVHC", RoHS=Yes, Stock 1=35326, Supplier 1=Digi-Key, Termination=SMD/SMT, Voltage Rating (DC)=100V, Width=5.84mm
D3: library part LED, "LED GREEN CLEAR CHIP SMD", Case Code (Imperial)=1206, Case Code (Metric)=3216, Color=Green, Forward Current=30mA, Forward Voltage=2V, Lens Color=Colorless, Manufacturer 1="Vishay Lite-On", Max Operating Temperature=85°C, Min Operating Temperature=-55°C, Package Quantity=1, Power Dissipation=75mW, Reverse Voltage=5V, Supplier Part Number 1=160-1456-1-ND, Test Current=20mA, Case/Package=1206, Category=LEDs, ComponentLink1Description=https://datasheet.ciiva.com/15118/getdatasheetpartid-214545-15118102.pdf?src-supplier=Verical, ComponentLink1URL=https://datasheet.ciiva.com/15118/getdatasheetpartid-214545-15118102.pdf?src-supplier=Verical, ComponentLink2Description=https://datasheet.ciiva.com/12400/lite-on-ltst-c230kgkt-190174-12400698.pdf?src-supplier=Mouser, ComponentLink2URL=https://datasheet.ciiva.com/12400/lite-on-ltst-c230kgkt-190174-12400698.pdf?src-supplier=Mouser, ComponentLink3Description=https://datasheet.ciiva.com/11773/0900766b80dc057a-11773900.pdf?src-supplier=RSComponents, ComponentLink3URL=https://datasheet.ciiva.com/11773/0900766b80dc057a-11773900.pdf?src-supplier=RSComponents, ComponentLink4Description=https://datasheet.ciiva.com/2110/s-110-ltst-c230kgkt-2110033.pdf?src-supplier=Digi-Key, ComponentLink4URL=https://datasheet.ciiva.com/2110/s-110-ltst-c230kgkt-2110033.pdf?src-supplier=Digi-Key, ComponentLink5Description=https://datasheet.ciiva.com/2110/s-110-ltst-c230kgkt-2110034.pdf?src-supplier=Digi-Key, ComponentLink5URL=https://datasheet.ciiva.com/2110/s-110-ltst-c230kgkt-2110034.pdf?src-supplier=Digi-Key, ComponentLink6Description=https://datasheet.ciiva.com/2110/s-110-ltst-c230kgkt-2110035.pdf?src-supplier=Digi-Key, ComponentLink6URL=https://datasheet.ciiva.com/2110/s-110-ltst-c230kgkt-2110035.pdf?src-supplier=Digi-Key, Depth=1.6mm, Dominant Wavelength=571nm, Height=1.1mm, Illumination Color=Green, Lead Free="Lead Free", Length=3.2mm, Lens Style=Diffused,Colorless,Clear,Rectangular, Lens Transparency=Clear, Luminous Intensity=35mcd, Manufacturer Part Number 1=LTST-C230KGKT, Mount="Surface Mount", Number of Elements=1, Number of LEDs=1, Number of Pins=2, Packaging="Tape and Reel", Power Rating=75mW, Pricing 1="1=0.32000, 10=0.23700, 100=0.11250, 500=0.07498, 1000=0.05873 (USD)", Radiation Hardening=No, RoHS=Yes, Stock 1=122865, Supplier 1=Digi-Key, Viewing Angle=130°, Wavelength=574nm, Width=1.6mm
FB1: library part "Ferrite Chip", "Ferrite Beads 0805 330ohms 2500mA Power Line AEC-Q200", Case Code (Imperial)=0805, Case Code (Metric)=2012, DC Resistance (DCR)=50mR, Manufacturer 1=TDK, Max Current Rating=2.5A, Max Operating Temperature=125°C, Min Operating Temperature=-55°C, Package Quantity=4000, Ratings=AEC-Q200, Supplier Part Number 1=445-172907-1-ND, Test Frequency=100MHz, Tolerance=25%, Case/Package=0805, Category=Inductors, ComponentLink1Description=https://media.digikey.com/pdf/Data%20Sheets/TDK%20PDFs/MPZ_Series_Br.pdf?src-supplier=Digi-Key, ComponentLink1URL=https://media.digikey.com/pdf/Data%20Sheets/TDK%20PDFs/MPZ_Series_Br.pdf?src-supplier=Digi-Key, ComponentLink2Description=http://www.mouser.com/ds/2/400/eads_commercial_power_mpz2012_en-923646.pdf?src-supplier=Mouser, ComponentLink2URL=http://www.mouser.com/ds/2/400/eads_commercial_power_mpz2012_en-923646.pdf?src-supplier=Mouser, Height=0.041inch, Impedance=330R, Lead Free="Lead Free", Length=0.079inch, Manufacturer Part Number 1=MPZ2012S331ATD25, Max DC Current=2.5A, Mount="Surface Mount", Number of Lines=1, Packaging="Tape and Reel", Pricing 1="1=0.13000, 10=0.10400, 25=0.08120, 50=0.06740, 100=0.05800, 250=0.04644, 500=0.04178, 1000=0.03482 (USD)", RoHS=Yes, Stock 1=5694, Supplier 1=Digi-Key, Termination=SMD/SMT, Weight=0.000194oz, Width=0.049inch
FB2: library part "Ferrite Chip", "FERRITE BEAD 1 KOHM 0805 1LN", Case Code (Imperial)=0805, Case Code (Metric)=2012, Current Rating=1A, DC Resistance (DCR)=150mR, Frequency=100MHz, Manufacturer 1=Laird, Max Operating Temperature=125°C, Min Operating Temperature=-40°C, Package Quantity=1, Supplier Part Number 1=240-2551-1-ND, Case/Package=0805, Category="Ferrite Beads and Chips", ComponentLink1Description=https://datasheet.ciiva.com/23606/1685905-23606792.pdf?src-supplier=Newark, ComponentLink1URL=https://datasheet.ciiva.com/23606/1685905-23606792.pdf?src-supplier=Newark, ComponentLink2Description=https://datasheet.ciiva.com/1013/mi0805j102r-10-b-1013338.pdf?src-supplier=Digi-Key, ComponentLink2URL=https://datasheet.ciiva.com/1013/mi0805j102r-10-b-1013338.pdf?src-supplier=Digi-Key, ComponentLink3Description=https://datasheet.ciiva.com/22650/1685905-22650412.pdf?src-supplier=Element14, ComponentLink3URL=https://datasheet.ciiva.com/22650/1685905-22650412.pdf?src-supplier=Element14, Contact Plating=Tin, Core Material=Ferrite, Depth=1.25mm, Height=0.9mm, Impedance=1kR, Lead Free="Lead Free", Length=2mm, Manufacturer Part Number 1=MI0805J102R-10, Material=Ferrite, Max Current Rating=1A, Max DC Current=1A, Mount="Surface Mount", Number of Lines=1, Packaging="Tape and Reel", Pricing 1="1=0.10000, 10=0.06400, 25=0.05800, 50=0.05220, 100=0.03830, 250=0.02788, 500=0.02556, 1000=0.02208 (USD)", REACH SVHC=Unknown, RoHS=Yes, Stock 1=691981, Supplier 1=Digi-Key, Termination=SMD/SMT, Test Frequency=100MHz, Weight=0.00392oz, Width=1.25mm
IC1 IC3: library part "INFINEON MOSFET N-CH SOT-23-3 GSD", "MOSFET MOSFT 60V 2.7A 92mOhm 2.5nC Qg", Case/Package=SOT-23, Continuous Drain Current (ID)=2.7A, Drain to Source Breakdown Voltage=60V, Drain to Source Resistance=116mR, Gate to Source Voltage (Vgs)=16V, Input Capacitance=290pF, Manufacturer 1="International Rectifier", Manufacturer Part Number 1=IRLML0060TRPBF, Max Operating Temperature=150°C, Max Power Dissipation=1.25W, Min Operating Temperature=-55°C, On-State Resistance=92MR, Package Quantity=1, Supplier Part Number 1=IRLML0060TRPBFCT-ND, Threshold Voltage=2.5V, Category=MOSFETs, ComponentLink1Description=https://datasheet.ciiva.com/6383/irlml0060pbf-6383265.pdf?src-supplier=Digi-Key, ComponentLink1URL=https://datasheet.ciiva.com/6383/irlml0060pbf-6383265.pdf?src-supplier=Digi-Key, ComponentLink2Description=https://datasheet.ciiva.com/7935/irlml0060pbf-7935677.pdf?src-supplier=Element14, ComponentLink2URL=https://datasheet.ciiva.com/7935/irlml0060pbf-7935677.pdf?src-supplier=Element14, ComponentLink3Description=https://datasheet.ciiva.com/6383/irlml0060pbf-6383262.pdf?src-supplier=Digi-Key, ComponentLink3URL=https://datasheet.ciiva.com/6383/irlml0060pbf-6383262.pdf?src-supplier=Digi-Key, ComponentLink4Description=https://datasheet.ciiva.com/16393/irlml0060pbf-16393454.pdf?src-supplier=Future+Electronics, ComponentLink4URL=https://datasheet.ciiva.com/16393/irlml0060pbf-16393454.pdf?src-supplier=Future+Electronics, ComponentLink5Description=https://datasheet.ciiva.com/29325/161182-da-01-en-mosfet-irlml0060trpbf-sot23-ir-29325526.pdf?src-supplier=Conrad, ComponentLink5URL=https://datasheet.ciiva.com/29325/161182-da-01-en-mosfet-irlml0060trpbf-sot23-ir-29325526.pdf?src-supplier=Conrad, Drain to Source Voltage (Vdss)=60V, Element Configuration=Single, Fall Time=4.2ns, Height=1.02mm, Lead Free="Lead Free", Length=3.04mm, Mount="Surface Mount", Nominal Vgs=2.5V, Number of Elements=1, Number of Pins=3, Packaging="Tape and Reel", Power Dissipation=1.25W, Pricing 1="1=0.40000, 10=0.34300, 100=0.23780, 500=0.18566, 1000=0.15091 (USD)", Rds On Max=92mR, REACH SVHC="No SVHC", Recovery Time=21ns, Rise Time=6.3ns, RoHS=Yes, Stock 1=361915, Supplier 1=Digi-Key, Turn-Off Delay Time=6.8ns, Turn-On Delay Time=5.4ns, Width=1.4mm
IC2: "IC LED CNV CONST CUR 2.5A 10MSOP", Case/Package=MSOP, Frequency=2MHz, Manufacturer 1="Texas Instruments", Manufacturer Part Number 1=TPS92512HVDGQR, Max Operating Temperature=125°C, Max Output Current=2.5A, Max Output Voltage=58V, Max Supply Current=407uA, Max Supply Voltage=60V, Min Operating Temperature=-40°C, Min Output Voltage=200mV, Output Voltage=65V, Package Quantity=2500, Quiescent Current=337uA, Supplier Part Number 1=296-41003-1-ND, Category="LED Drivers", ComponentLink1Description=http://www.ti.com/lit/gpn/tps92512hv?src-supplier=Mouser, ComponentLink1URL=http://www.ti.com/lit/gpn/tps92512hv?src-supplier=Mouser, ComponentLink2Description=http://www.ti.com/general/docs/lit/getliterature.tsp?genericPartNumber=TPS92512&&fileType=pdf&src-supplier=Avnet+Asia, ComponentLink2URL=http://www.ti.com/general/docs/lit/getliterature.tsp?genericPartNumber=TPS92512&&fileType=pdf&src-supplier=Avnet+Asia, ComponentLink3Description=http://www.ti.com/lit/ds/symlink/tps92512.pdf?src-supplier=Digi-Key, ComponentLink3URL=http://www.ti.com/lit/ds/symlink/tps92512.pdf?src-supplier=Digi-Key, Contact Plating=Gold, Dimming=PWM, Lead Free="Lead Free", Mount="Surface Mount", Number of Outputs=1, Number of Pins=10, Output Current=2.5A, Output Current per Channel=2.5A, Packaging="Tape and Reel", Pricing 1="1=1.50000, 10=1.33700, 100=0.97440, 500=0.81576, 1000=0.63448 (USD)", RoHS=Yes, Stock 1=8303, Supplier 1=Digi-Key, Weight=0.005051oz
IC4: "IC REG BUCK ADJ 500MA 10VSON", Manufacturer 1="Texas Instruments", Manufacturer Part Number 1=LM5166DRCT, Max Operating Temperature=150°C, Min Operating Temperature=-40°C, Supplier Part Number 1=296-45296-1-ND, Category="Voltage Regulators - Switching", ComponentLink1Description=http://www.ti.com/lit/ds/symlink/lm5166.pdf?src-supplier=Avnet+Europe, ComponentLink1URL=http://www.ti.com/lit/ds/symlink/lm5166.pdf?src-supplier=Avnet+Europe, ComponentLink2Description=http://www.ti.com/lit/ds/symlink/lm5166.pdf?src-supplier=Digi-Key, ComponentLink2URL=http://www.ti.com/lit/ds/symlink/lm5166.pdf?src-supplier=Digi-Key, ComponentLink3Description=http://www.ti.com/lit/ds/symlink/lm5166.pdf?src-supplier=Arrow, ComponentLink3URL=http://www.ti.com/lit/ds/symlink/lm5166.pdf?src-supplier=Arrow, ComponentLink4Description=http://www.ti.com/lit/ds/symlink/lm5166.pdf?src-supplier=Mouser, ComponentLink4URL=http://www.ti.com/lit/ds/symlink/lm5166.pdf?src-supplier=Mouser, ComponentLink5Description=http://www.ti.com/lit/ds/symlink/lm5166.pdf?src-supplier=Avnet+Asia, ComponentLink5URL=http://www.ti.com/lit/ds/symlink/lm5166.pdf?src-supplier=Avnet+Asia, ComponentLink6Description=http://www.ti.com/lit/ds/symlink/lm5166.pdf?src-supplier=Verical, ComponentLink6URL=http://www.ti.com/lit/ds/symlink/lm5166.pdf?src-supplier=Verical, ComponentLink7Description=http://www.ti.com/lit/ds/symlink/lm5166.pdf?src-supplier=Newark, ComponentLink7URL=http://www.ti.com/lit/ds/symlink/lm5166.pdf?src-supplier=Newark, ComponentLink8Description=http://www.ti.com/general/docs/lit/getliterature.tsp?genericPartNumber=LM5166&fileType=pdf&src-supplier=Farnell, ComponentLink8URL=http://www.ti.com/general/docs/lit/getliterature.tsp?genericPartNumber=LM5166&fileType=pdf&src-supplier=Farnell, ComponentLink9Description=http://www.ti.com/lit/ds/symlink/lm5166.pdf?src-supplier=Avnet, ComponentLink9URL=http://www.ti.com/lit/ds/symlink/lm5166.pdf?src-supplier=Avnet, Pricing 1="1=3.87000, 10=3.47700, 100=2.70290 (USD)", RoHS=No, Stock 1=4750, Supplier 1=Digi-Key
J1 J3: "TERM BLOCK HDR 2POS 90DEG 3.81MM", Manufacturer 1=Amphenol, Manufacturer Part Number 1=OQ0232510000G, Supplier Part Number 1=609-3819-ND, ComponentLink1Description=http://www.anytek.com.tw/UserUpFiles/20120526/jMKyryrC5T7A.pdf?src-supplier=Digi-Key, ComponentLink1URL=http://www.anytek.com.tw/UserUpFiles/20120526/jMKyryrC5T7A.pdf?src-supplier=Digi-Key, Pricing 1="1=0.49000, 10=0.25600, 25=0.18120, 50=0.15420, 100=0.14870, 250=0.12572, 500=0.11628, 1000=0.10275, 5000=0.07842 (USD)", RoHS=No, Stock 1=14524, Supplier 1=Digi-Key